# EAGLE board keyboardPCB (EAGLE 9.2.2), part 1 of 2
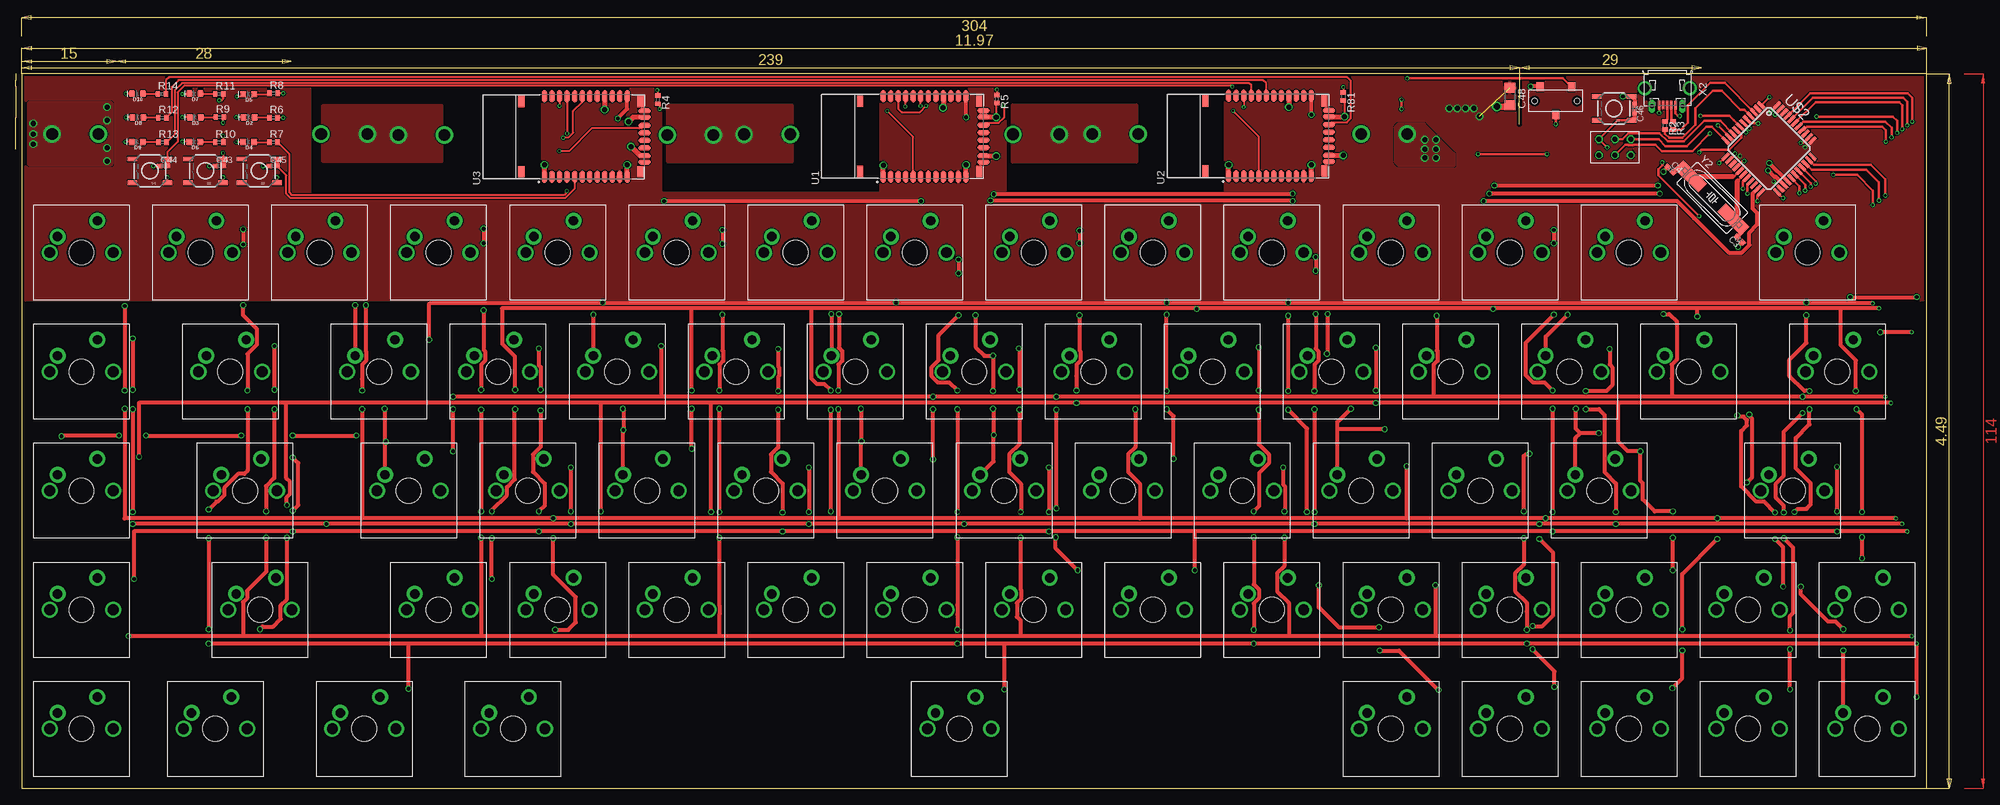
[diagram p0: board, top side]
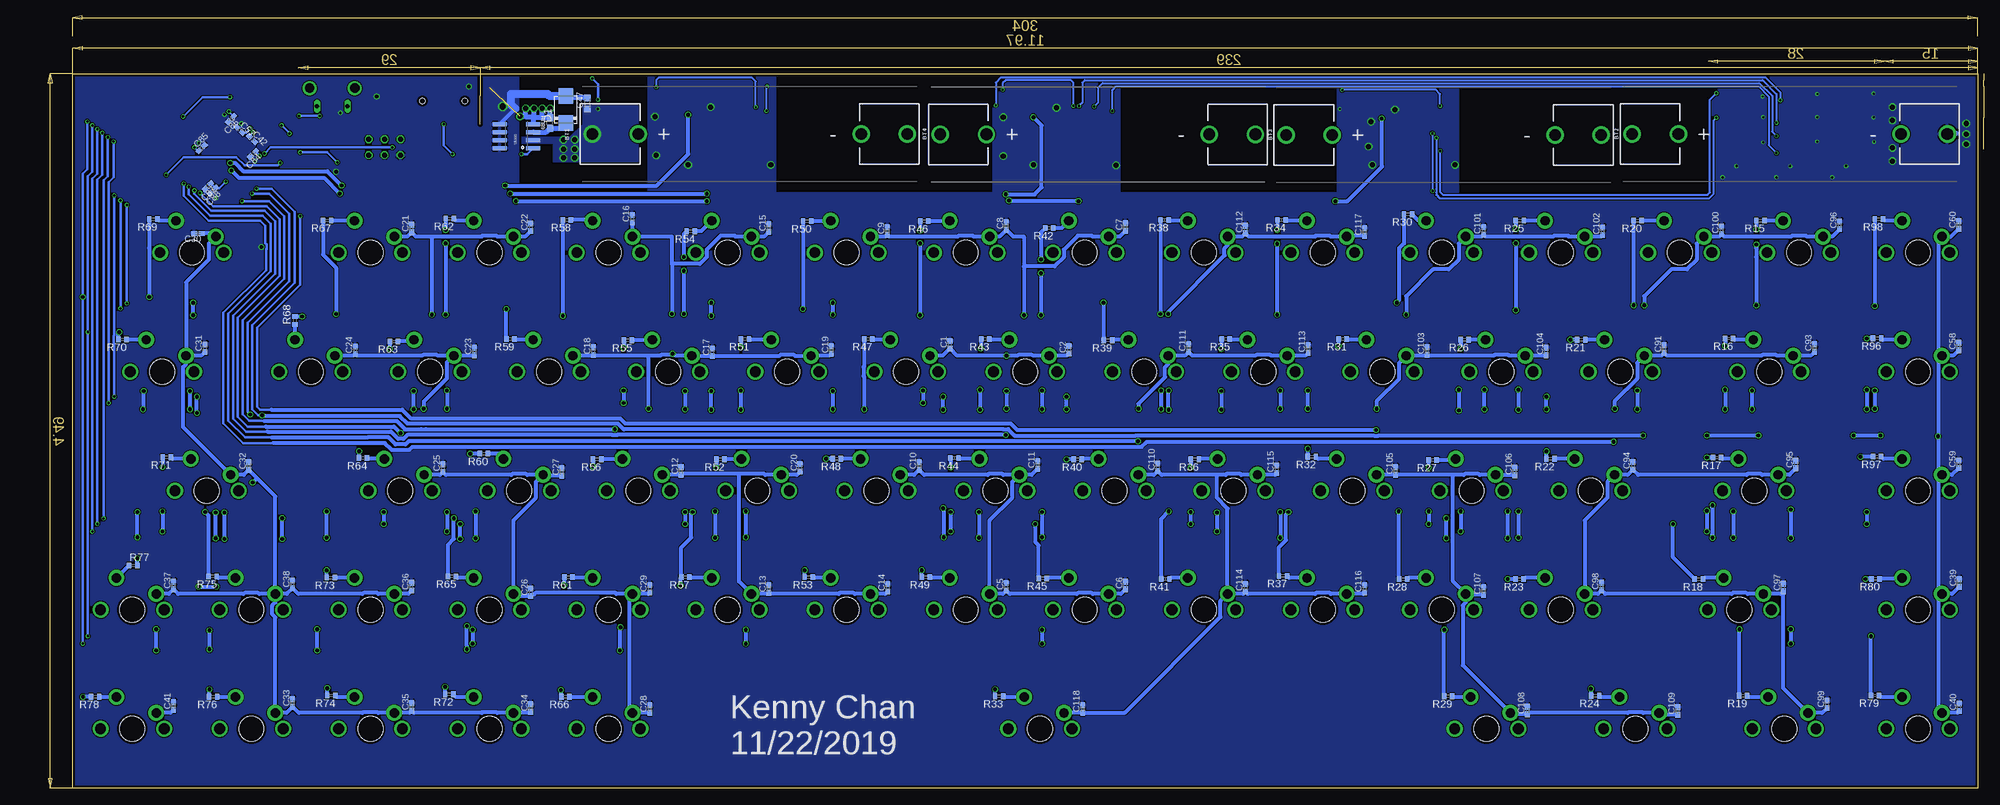
[diagram p1: board, bottom side, seen from below]

Size 304 x 114 mm. Coordinates in mm from the lower left corner, seen from the top.
Outline: 0,0 304,0 304,114 0,114 0,0
Copper layers (1*16): Top 0.035559375mm / dielectric 1.6mm / Bottom 0.035559375mm
Design rules "oshpark-2layer": minimum track width 6mil, minimum drill 10mil, track to track 6mil, track to pad 6mil, pad to pad 6mil, via to via 6mil, smd to smd 6mil, copper to edge 15mil, drill to drill 6mil, minimum pad ring 5mil, minimum via ring 5mil, stop-mask expansion 2.5mil, vias tented up to drill 0mil, thermal gap 10mil

## Footprints (pad centres in the part's own frame; a part is rotated, then mirrored left to right if it is on the bottom)
0603 = smd 1.1 x 1: 1 -0.85,0; 2 0.85,0
BATTERY-AA = drill 1.854: GND@1 25.146,0; GND@2 17.78,0; PWR@1 -25.146,0; PWR@2 -17.78,0
C0402K = smd 0.925 x 0.74: 1 -0.6,0; 2 0.6,0
C0603K = smd 1.05 x 1.08: 1 -0.875,0; 2 0.875,0
C1206 = smd 1.6 x 1.8: 1 -1.4,0; 2 1.4,0
DO214AA = smd 2.5 x 2.3: A 2.15,0; C -2.15,0
LED-0603 = smd 1 x 1: A -0.877,0; C 0.877,0
R0402 = smd 0.7 x 0.9: 1 -0.65,0; 2 0.65,0
TACTILE-SWITCH-SMD = smd 1.524 x 0.762: 1 -2.794,1.905; 2 2.794,1.905; 3 -2.794,-1.905; 4 2.794,-1.905
CL-SB-12B = smd 1.2 x 1.4: 1 -2.5,-2.25; 2 0,2.25; 3 2.5,-2.25 | hole 0.9: 3.4,0; -3.4,0
XCVR_RN42-I/RM = smd 2 x 0.8: 1 -6.4,6.6; 2 -6.4,5.4; 3 -6.4,4.2; 4 -6.4,3; 5 -6.4,1.8; 6 -6.4,0.6; 7 -6.4,-0.6; 8 -6.4,-1.8; 9 -6.4,-3; 10 -6.4,-4.2; 11 -6.4,-5.4; 12 -6.4,-6.6; 13 6.4,-6.6; 14 6.4,-5.4; 15 6.4,-4.2; 16 6.4,-3; 17 6.4,-1.8; 18 6.4,-0.6; 19 6.4,0.6; 20 6.4,1.8; 21 6.4,3; 22 6.4,4.2; 23 6.4,5.4; 24 6.4,6.6 | smd 0.8 x 2: 28 3.1,-9.4; 29 -3.1,-9.4; 30 4.1,-9.4; 31 1.8,-9.4; 32 0.6,-9.4; 33 -0.6,-9.4; 34 -1.8,-9.4; 35 -4.1,-9.4 | smd 1.8 x 1: S1 -5.6,-8.7; S2 5.6,-8.7; S3 5.6,10.3; S4 -5.6,10.3
CHERRY-MX = drill 1.714 pad 1.93: P$3 -5.08,0; P$4 5.08,0 | drill 1.5 pad 2.54: SW1 -3.81,2.54; SW2 2.54,5.08 | hole 4: 0,0
TQFP44 = smd 1.5 x 0.5: 1 -5.8,4; 2 -5.8,3.2; 3 -5.8,2.4; 4 -5.8,1.6; 5 -5.8,0.8; 6 -5.8,0; 7 -5.8,-0.8; 8 -5.8,-1.6; 9 -5.8,-2.4; 10 -5.8,-3.2; 11 -5.8,-4; 23 5.8,-4; 24 5.8,-3.2; 25 5.8,-2.4; 26 5.8,-1.6; 27 5.8,-0.8; 28 5.8,0; 29 5.8,0.8; 30 5.8,1.6; 31 5.8,2.4; 32 5.8,3.2; 33 5.8,4 | smd 0.5 x 1.5: 12 -4,-5.8; 13 -3.2,-5.8; 14 -2.4,-5.8; 15 -1.6,-5.8; 16 -0.8,-5.8; 17 0,-5.8; 18 0.8,-5.8; 19 1.6,-5.8; 20 2.4,-5.8; 21 3.2,-5.8; 22 4,-5.8; 34 4,5.8; 35 3.2,5.8; 36 2.4,5.8; 37 1.6,5.8; 38 0.8,5.8; 39 0,5.8; 40 -0.8,5.8; 41 -1.6,5.8; 42 -2.4,5.8; 43 -3.2,5.8; 44 -4,5.8
AVR-ISP = drill 0.8 octagon: GND 2.54,1.27; MISO -2.54,-1.27; MOSI 0,1.27; RST 2.54,-1.27; SCK 0,-1.27; VCC -2.54,1.27
SOIC-8 = smd 0.61 x 2.21: 1 -1.905,-2.54; 2 -0.635,-2.54; 3 0.635,-2.54; 4 1.905,-2.54; 5 1.905,2.794; 6 0.635,2.794; 7 -0.635,2.794; 8 -1.905,2.794
ZX62D-B-5PA8 = smd 1.35 x 0.4: 1 4.825,1.3; 2 4.825,0.65; 3 4.825,0; 4 4.825,-0.65; 5 4.825,-1.3 | drill 1.5: S1 2.15,-3.6; S2 2.15,3.6 | drill 0.7 long: S3 5.05,2.425; S4 5.05,-2.425
HC49UP = smd 5.334 x 1.93: 1 -4.826,0; 2 4.826,0

## Placement (x,y rotation side)
68UH  33nH/±5%/500mA  [0603]  227.84,106.19 90 bottom
BT1  1.5V  [BATTERY-AA]  195.96,104.41 0 bottom
BT2  1.5V  [BATTERY-AA]  29.97,104.41 0 bottom
BT3  1.5V  [BATTERY-AA]  85.22,104.28 0 bottom
BT4  1.5V  [BATTERY-AA]  140.4,104.37 0 bottom
C1  1uF  [C0402K]  164.01,70.8 90 bottom
C2  1uF  [C0402K]  145.01,69.99 90 bottom
C3  28pF  [C0402K]  274.21,87.57 135 top
C4  28pF  [C0402K]  263.11,98.73 315 top
C5  1uF  [C0402K]  155.01,32.18 90 bottom
C6  1uF  [C0402K]  136.01,32.37 90 bottom
C7  1uF  [C0402K]  136.01,89.56 90 bottom
C8  1uF  [C0402K]  155.01,89.75 90 bottom
C9  1uF  [C0402K]  174.01,88.94 90 bottom
C10  1uF  [C0402K]  168.93,51.44 90 bottom
C11  1uF  [C0402K]  150.01,51.61 90 bottom
C12  1uF  [C0402K]  206.93,50.63 90 bottom
C13  1uF  [C0402K]  192.93,31.82 90 bottom
C14  1uF  [C0402K]  173.93,32.01 90 bottom
C15  1uF  [C0402K]  192.93,89.4 90 bottom
C16  1uF  [C0402K]  214.73,90.89 90 bottom
C17  1uF  [C0402K]  201.93,69.58 90 bottom
C18  1uF  [C0402K]  220.93,69.77 90 bottom
C19  1uF  [C0402K]  182.93,69.96 90 bottom
C20  1uF  [C0402K]  187.93,51.15 90 bottom
C21  1uF  [C0402K]  249.93,89.34 90 bottom
C22  1uF  [C0402K]  230.93,89.53 90 bottom
C23  1uF  [C0402K]  239.93,69.72 90 bottom
C24  1uF  [C0402K]  258.93,69.91 90 bottom
C25  1uF  [C0402K]  244.93,51.1 90 bottom
C26  1uF  [C0402K]  230.93,31.29 90 bottom
C27  1uF  [C0402K]  225.93,50.48 90 bottom
C28  1uF  [C0402K]  211.93,12.67 90 bottom
C29  1uF  [C0402K]  211.93,31.86 90 bottom
C30  1uF  [C0402K]  284.05,88.57 180 bottom
C31  1uF  [C0402K]  282.93,70.24 90 bottom
C32  1uF  [C0402K]  275.93,51.43 90 bottom
C33  1uF  [C0402K]  268.93,13.62 90 bottom
C34  1uF  [C0402K]  230.93,12.81 90 bottom
C35  1uF  [C0402K]  249.93,13 90 bottom
C36  1uF  [C0402K]  249.93,32.19 90 bottom
C37  1uF  [C0402K]  287.93,32.38 90 bottom
C38  1uF  [C0402K]  268.93,32.57 90 bottom
C39  1uF  [C0402K]  2.93,32.76 90 bottom
C40  1uF  [C0402K]  2.93,12.95 90 bottom
C41  1uF  [C0402K]  287.93,13.14 90 bottom
C42  10uF  [C0402K]  275.4,103.6 315 bottom
C43  100nF  [C0402K]  31.5,99.3 0 top
C44  100nF  [C0402K]  22.6,99.3 0 top
C45  100nF  [C0402K]  40.1,99.3 0 top
C46  100nF  [C0402K]  257.4,108.5 270 top
C47  15uF  [C0603K]  221.9,109.3 90 bottom
C48  220uF  [C1206]  237.5,110.4 270 top
C57  1uF  [C0402K]  277.39,105.07 315 bottom
C58  1uF  [C0402K]  3.01,70.52 90 bottom
C59  1uF  [C0402K]  3.01,51.71 90 bottom
C60  1uF  [C0402K]  3.01,89.9 90 bottom
C84  0.1uF  [C0402K]  275.25,101.25 225 bottom
C85  0.1uF  [C0402K]  283.45,102.17 45 bottom
C86  0.1uF  [C0402K]  278.75,106.81 225 bottom
C87  0.1uF  [C0402K]  282.45,96.09 225 bottom
C88  4.7uF  [C0402K]  281.65,95.37 225 bottom
C91  1uF  [C0402K]  50.01,70.09 90 bottom
C93  1uF  [C0402K]  26.01,70.28 90 bottom
C94  1uF  [C0402K]  55.01,51.47 90 bottom
C95  1uF  [C0402K]  29.01,51.66 90 bottom
C96  1uF  [C0402K]  22.01,89.85 90 bottom
C97  1uF  [C0402K]  31.01,32.04 90 bottom
C98  1uF  [C0402K]  60.01,32.23 90 bottom
C99  1uF  [C0402K]  24.01,13.42 90 bottom
C100  1uF  [C0402K]  40.85,89.05 90 bottom
C101  1uF  [C0402K]  78.85,88.97 90 bottom
C102  1uF  [C0402K]  59.85,88.89 90 bottom
C103  1uF  [C0402K]  87.85,69.81 90 bottom
C104  1uF  [C0402K]  68.85,69.73 90 bottom
C105  1uF  [C0402K]  92.85,50.65 90 bottom
C106  1uF  [C0402K]  73.85,50.57 90 bottom
C107  1uF  [C0402K]  78.85,31.49 90 bottom
C108  1uF  [C0402K]  71.85,12.41 90 bottom
C109  1uF  [C0402K]  47.85,12.33 90 bottom
C110  1uF  [C0402K]  130.85,51.25 90 bottom
C111  1uF  [C0402K]  125.93,70.25 90 bottom
C112  1uF  [C0402K]  116.85,89.17 90 bottom
C113  1uF  [C0402K]  106.85,70.09 90 bottom
C114  1uF  [C0402K]  116.85,32.01 90 bottom
C115  1uF  [C0402K]  111.85,50.93 90 bottom
C116  1uF  [C0402K]  97.85,31.85 90 bottom
C117  1uF  [C0402K]  97.85,88.77 90 bottom
C118  1uF  [C0402K]  142.85,12.69 90 bottom
D1  S2A  [DO214AA]  225.34,108.32 90 bottom
D2  GREEN  [LED-0603]  36.26,107.06 180 top
D3  GREEN  [LED-0603]  27.67,107.06 180 top
D4  GREEN  [LED-0603]  36.18,103.16 180 top
D5  RED  [LED-0603]  36.19,110.76 180 top
D6  GREEN  [LED-0603]  27.6,103.16 180 top
D7  RED  [LED-0603]  27.61,110.86 180 top
D8  GREEN  [LED-0603]  18.52,107.06 180 top
D9  GREEN  [LED-0603]  18.43,103.16 180 top
D10  RED  [LED-0603]  18.44,110.86 180 top
R2  22Ohm  [R0402]  262.24,105.79 270 top
R3  22Ohm  [R0402]  263.51,105.79 270 top
R4  10k Ohm  [R0402]  101.5,109.9 270 top
R5  10k Ohm  [R0402]  155.6,110 270 top
R6  55 Ohm  [R0402]  40.15,107.01 0 top
R7  55 Ohm  [R0402]  40.16,103.11 0 top
R8  55 Ohm  [R0402]  40.17,110.91 0 top
R9  55 Ohm  [R0402]  31.58,107.11 0 top
R10  55 Ohm  [R0402]  31.49,103.11 0 top
R11  55 Ohm  [R0402]  31.5,110.81 0 top
R12  55 Ohm  [R0402]  22.41,107.01 0 top
R13  55 Ohm  [R0402]  22.42,103.11 0 top
R14  55 Ohm  [R0402]  22.33,110.81 0 top
R15  1k  [R0402]  34.67,90.59 180 bottom
R16  1k  [R0402]  39.65,71.79 180 bottom
R17  1k  [R0402]  41.57,52.79 180 bottom
R18  1k  [R0402]  44.49,33.39 180 bottom
R19  1k  [R0402]  37.41,14.79 180 bottom
R20  1k  [R0402]  54.27,90.59 180 bottom
R21  1k  [R0402]  63.25,71.59 180 bottom
R22  1k  [R0402]  68.17,52.59 180 bottom
R23  1k  [R0402]  73.09,33.39 180 bottom
R24  1k  [R0402]  61.01,14.79 180 bottom
R25  1k  [R0402]  73.07,90.59 180 bottom
R26  1k  [R0402]  81.85,71.59 180 bottom
R27  1k  [R0402]  86.97,52.39 180 bottom
R28  1k  [R0402]  91.69,33.39 180 bottom
R29  1k  [R0402]  84.49,14.71 180 bottom
R30  1k  [R0402]  90.91,91.61 180 bottom
R31  1k  [R0402]  101.33,71.71 180 bottom
R32  1k  [R0402]  106.25,52.91 180 bottom
R33  1k  [R0402]  156.17,14.71 180 bottom
R34  1k  [R0402]  111.09,90.71 180 bottom
R35  1k  [R0402]  120.01,71.71 180 bottom
R36  1k  [R0402]  124.93,52.51 180 bottom
R37  1k  [R0402]  110.85,33.91 180 bottom
R38  1k  [R0402]  129.77,90.71 180 bottom
R39  1k  [R0402]  138.79,71.51 180 bottom
R40  1k  [R0402]  143.61,52.51 180 bottom
R41  1k  [R0402]  129.63,33.41 180 bottom
R42  1k  [R0402]  148.15,89.41 180 bottom
R43  1k  [R0402]  158.37,71.71 180 bottom
R44  1k  [R0402]  163.29,52.71 180 bottom
R45  1k  [R0402]  149.21,33.51 180 bottom
R46  1k  [R0402]  168.13,90.51 180 bottom
R47  1k  [R0402]  177.05,71.71 180 bottom
R48  1k  [R0402]  182.07,52.61 180 bottom
R49  1k  [R0402]  167.89,33.71 180 bottom
R50  1k  [R0402]  186.81,90.51 180 bottom
R51  1k  [R0402]  196.73,71.71 180 bottom
R52  1k  [R0402]  200.65,52.51 180 bottom
R53  1k  [R0402]  186.57,33.71 180 bottom
R54  1k  [R0402]  205.39,88.91 180 bottom
R55  1k  [R0402]  215.41,71.51 180 bottom
R56  1k  [R0402]  220.33,52.51 180 bottom
R57  1k  [R0402]  206.25,33.71 180 bottom
R58  1k  [R0402]  225.17,90.71 180 bottom
R59  1k  [R0402]  234.19,71.71 180 bottom
R60  1k  [R0402]  238.41,53.41 180 bottom
R61  1k  [R0402]  224.93,33.71 180 bottom
R62  1k  [R0402]  243.85,90.91 180 bottom
R63  1k  [R0402]  252.77,71.31 180 bottom
R64  1k  [R0402]  257.69,52.71 180 bottom
R65  1k  [R0402]  243.49,33.83 180 bottom
R66  1k  [R0402]  225.41,14.63 180 bottom
R67  1k  [R0402]  263.43,90.63 180 bottom
R68  1k  [R0402]  268.57,74.65 90 bottom
R69  1k  [R0402]  291.17,90.83 180 bottom
R70  1k  [R0402]  296.09,71.63 180 bottom
R71  1k  [R0402]  289.01,52.83 180 bottom
R72  1k  [R0402]  243.93,15.03 180 bottom
R73  1k  [R0402]  262.85,33.63 180 bottom
R74  1k  [R0402]  262.77,14.83 180 bottom
R75  1k  [R0402]  281.69,33.83 180 bottom
R76  1k  [R0402]  281.61,14.63 180 bottom
R77  1k  [R0402]  294.37,35.57 0 bottom
R78  1k  [R0402]  300.45,14.63 180 bottom
R79  1k  [R0402]  16.37,14.83 180 bottom
R80  1k  [R0402]  16.29,33.43 180 bottom
R81  10k Ohm  [R0402]  210.9,110.4 270 top
R96  1k  [R0402]  16.01,71.83 180 bottom
R97  1k  [R0402]  16.03,52.93 180 bottom
R98  1k  [R0402]  15.75,90.83 180 bottom
S1  SWITCH-MOMENTARY-2SMD  [TACTILE-SWITCH-SMD]  254.1,108.5 180 top
S2  SWITCH-MOMENTARY-2SMD  [TACTILE-SWITCH-SMD]  37.87,98.53 180 top
S3  SWITCH-MOMENTARY-2SMD  [TACTILE-SWITCH-SMD]  29.3,98.53 180 top
S4  SWITCH-MOMENTARY-2SMD  [TACTILE-SWITCH-SMD]  20.43,98.53 180 top
S5  CL-SB-12B-01T  [CL-SB-12B]  244.8,109.7 180 top
U1  RN42-I/RM  [XCVR_RN42-I/RM]  144.06,104.03 90 top
U2  RN42-I/RM  [XCVR_RN42-I/RM]  199.2,104.1 90 top
U3  RN42-I/RM  [XCVR_RN42-I/RM]  90.01,104.01 90 top
U$1  CHERRY-MX  [CHERRY-MX]  142.5,85.5 0 top
U$2  ATMEGA32U4-AU  [TQFP44]  278.86,102.08 315 top
U$3  CHERRY-MX  [CHERRY-MX]  152,66.5 0 top
U$4  CHERRY-MX  [CHERRY-MX]  156.75,47.5 0 top
U$5  CHERRY-MX  [CHERRY-MX]  142.5,28.5 0 top
U$6  CHERRY-MX  [CHERRY-MX]  161.5,85.5 0 top
U$7  CHERRY-MX  [CHERRY-MX]  171,66.5 0 top
U$8  CHERRY-MX  [CHERRY-MX]  175.75,47.5 0 top
U$9  CHERRY-MX  [CHERRY-MX]  161.5,28.5 0 top
U$10  CHERRY-MX  [CHERRY-MX]  180.5,85.5 0 top
U$11  CHERRY-MX  [CHERRY-MX]  190,66.5 0 top
U$12  CHERRY-MX  [CHERRY-MX]  194.75,47.5 0 top
U$13  CHERRY-MX  [CHERRY-MX]  180.5,28.5 0 top
U$14  CHERRY-MX  [CHERRY-MX]  199.5,85.5 0 top
U$15  CHERRY-MX  [CHERRY-MX]  209,66.5 0 top
U$16  CHERRY-MX  [CHERRY-MX]  213.75,47.5 0 top
U$17  CHERRY-MX  [CHERRY-MX]  199.5,28.5 0 top
U$18  CHERRY-MX  [CHERRY-MX]  218.5,85.5 0 top
U$19  CHERRY-MX  [CHERRY-MX]  228,66.5 0 top
U$20  CHERRY-MX  [CHERRY-MX]  232.75,47.5 0 top
U$21  CHERRY-MX  [CHERRY-MX]  218.5,28.5 0 top
U$22  CHERRY-MX  [CHERRY-MX]  237.5,85.5 0 top
U$23  CHERRY-MX  [CHERRY-MX]  247,66.5 0 top
U$24  CHERRY-MX  [CHERRY-MX]  251.75,47.5 0 top
U$25  CHERRY-MX  [CHERRY-MX]  237.5,28.5 0 top
U$26  CHERRY-MX  [CHERRY-MX]  218.5,9.5 0 top
U$27  CHERRY-MX  [CHERRY-MX]  256.5,85.5 0 top
U$28  CHERRY-MX  [CHERRY-MX]  266,66.5 0 top
U$29  CHERRY-MX  [CHERRY-MX]  285,85.5 0 top
U$30  CHERRY-MX  [CHERRY-MX]  289.75,66.5 0 top
U$31  CHERRY-MX  [CHERRY-MX]  282.62,47.5 0 top
U$32  CHERRY-MX  [CHERRY-MX]  237.5,9.5 0 top
U$33  CHERRY-MX  [CHERRY-MX]  256.5,28.5 0 top
U$34  CHERRY-MX  [CHERRY-MX]  256.5,9.5 0 top
U$35  CHERRY-MX  [CHERRY-MX]  275.5,28.5 0 top
U$36  CHERRY-MX  [CHERRY-MX]  275.5,9.5 0 top
U$37  CHERRY-MX  [CHERRY-MX]  294.5,28.5 0 top
U$38  CHERRY-MX  [CHERRY-MX]  294.5,9.5 0 top
U$39  CHERRY-MX  [CHERRY-MX]  9.5,9.5 0 top
U$40  CHERRY-MX  [CHERRY-MX]  9.5,28.5 0 top
U$56  CHERRY-MX  [CHERRY-MX]  9.5,66.5 0 top
U$57  CHERRY-MX  [CHERRY-MX]  9.5,47.5 0 top
U$58  CHERRY-MX  [CHERRY-MX]  9.5,85.5 0 top
U$59  AVR-ISP  [AVR-ISP]  254.24,102.31 180 top
U$166  MIC4680  [SOIC-8]  233.07,104.07 90 bottom
U$167  CHERRY-MX  [CHERRY-MX]  28.5,85.5 0 top
U$168  CHERRY-MX  [CHERRY-MX]  33.25,66.5 0 top
U$169  CHERRY-MX  [CHERRY-MX]  35.62,47.5 0 top
U$170  CHERRY-MX  [CHERRY-MX]  38,28.5 0 top
U$171  CHERRY-MX  [CHERRY-MX]  30.88,9.5 0 top
U$172  CHERRY-MX  [CHERRY-MX]  47.5,85.5 0 top
U$173  CHERRY-MX  [CHERRY-MX]  57,66.5 0 top
U$174  CHERRY-MX  [CHERRY-MX]  61.75,47.5 0 top
U$175  CHERRY-MX  [CHERRY-MX]  66.5,28.5 0 top
U$176  CHERRY-MX  [CHERRY-MX]  54.62,9.5 0 top
U$177  CHERRY-MX  [CHERRY-MX]  66.5,85.5 0 top
U$178  CHERRY-MX  [CHERRY-MX]  76,66.5 0 top
U$179  CHERRY-MX  [CHERRY-MX]  80.75,47.5 0 top
U$180  CHERRY-MX  [CHERRY-MX]  85.5,28.5 0 top
U$181  CHERRY-MX  [CHERRY-MX]  78.38,9.5 0 top
U$182  CHERRY-MX  [CHERRY-MX]  85.5,85.5 0 top
U$183  CHERRY-MX  [CHERRY-MX]  95,66.5 0 top
U$184  CHERRY-MX  [CHERRY-MX]  99.75,47.5 0 top
U$185  CHERRY-MX  [CHERRY-MX]  149.62,9.5 0 top
U$186  CHERRY-MX  [CHERRY-MX]  104.5,85.5 0 top
U$187  CHERRY-MX  [CHERRY-MX]  114,66.5 0 top
U$188  CHERRY-MX  [CHERRY-MX]  118.75,47.5 0 top
U$189  CHERRY-MX  [CHERRY-MX]  104.5,28.5 0 top
U$190  CHERRY-MX  [CHERRY-MX]  123.5,85.5 0 top
U$191  CHERRY-MX  [CHERRY-MX]  133,66.5 0 top
U$192  CHERRY-MX  [CHERRY-MX]  137.75,47.5 0 top
U$193  CHERRY-MX  [CHERRY-MX]  123.5,28.5 0 top
X2  ZX62D-B-5PA8  [ZX62D-B-5PA8]  262.6,113.9 270 top
Y2  16MHz  [HC49UP]  269.75,94.24 315 top

## Library data of the parts
68UH = SparkFun-Coils; PROD_ID: NDUC-07874
BT1-BT4 = SparkFun-Batteries; PROD_ID: BATT-08316; SF_SKU: PRT-07949
C1-C46 C57-C60 C84-C88 C91 C93-C118 R2-R81 R96-R98 = resistor
C47 C48 = rcl; SPICEPREFIX: C
D1 = s2x_10; MF: Fairchild; MPN: S2A; OC_FARNELL: 1467485; OC_NEWARK: 58K2391
D2-D4 D6 D8 D9 = SparkFun-LED; PROD_ID: DIO-00821
D5 D7 D10 = SparkFun-LED; PROD_ID: DIO-00819
S1-S4 = quad; PROD_ID: SWCH-08247
S5 = CL-SB-12B-01T; AVAILABILITY: Unavailable; DESCRIPTION: Switch Slide N.O./N.C. SPDT Top Slide 0.2A 12VDC Gull Wing SMD T/R; MF: Nidec Copal; MP: CL-SB-12B-01T; PACKAGE: None; PRICE: None
U1-U3 = RN42-I_RM; AVAILABILITY: Unavailable; DESCRIPTION: Bluetooth Module; MF: Microchip; MP: RN42-I/RM; PACKAGE: SMD-35 Roving Networks; PRICE: None
U$1 U$3-U$40 U$56-U$58 U$167-U$193 = cherrymx
U$2 = adafruit
U$59 = AVR-ISP; AVAILABILITY: Unavailable; DESCRIPTION: Emulators / Simulators AVR USB IN CIRCUIT EMUL/PRGMR ISP; MF: Gravitech; MP: AVR-ISP; PACKAGE: None; PRICE: None
U$166 = MIC4680; AVAILABILITY: Unavailable; MF: Micrel; MP: MIC4680; PACKAGE: None; PRICE: None
X2 = MicroUSB; MF: Hirose; MPN: ZX62D-B-5PA8; OC_FARNELL: 2300438; OC_NEWARK: 69W0712
Y2 = quad

## Nets
3.3V: 68UH.2 C48.1 C84.1 C85.1 C86.1 C87.1 C88.1 U1.11 U2.11 U3.11 U$2.2 U$2.14 U$2.24 U$2.34 U$2.42 U$2.44 U$59.VCC U$166.4
CONNECTLED1: R6.2 U3.19
CONNECTLED2: R9.2 U1.19
CONNECTLED3: R12.2 U2.19
D+: R2.2 U$2.4
D-: R3.2 U$2.3
GND: BT2.GND@1 C1.2 C2.2 C3.1 C4.1 C5.2 C6.2 C7.2 C8.2 C9.2 C10.2 C11.2 C12.2 C13.2 C14.2 C15.2 C16.2 C17.2 C18.2 C19.2 C20.2 C21.2 C22.2 C23.2 C24.2 C25.2 C26.2 C27.2 C28.2 C29.2 C30.2 C31.2 C32.2 C33.2 C34.2 C35.2 C36.2 C37.2 C38.2 C39.2 C40.2 C41.2 C42.2 C43.1 C44.1 C45.1 C46.1 C47.2 C48.2 C57.1 C58.2 C59.2 C60.2 C84.2 C85.2 C86.2 C87.2 C88.2 C91.2 C93.2 C94.2 C95.2 C96.2 C97.2 C98.2 C99.2 C100.2 C101.2 C102.2 C103.2 C104.2 C105.2 C106.2 C107.2 C108.2 C109.2 C110.2 C111.2 C112.2 C113.2 C114.2 C115.2 C116.2 C117.2 C118.2 D1.A D2.C D3.C D4.C D5.C D6.C D7.C D8.C D9.C D10.C R4.2 R5.2 R81.2 S1.3 S2.1 S3.1 S4.1 S5.3 U1.1 U1.12 U1.16 U1.28 U1.29 U2.1 U2.12 U2.16 U2.28 U2.29 U3.1 U3.12 U3.16 U3.28 U3.29 U$2.5 U$2.15 U$2.23 U$2.35 U$2.43 U$59.GND U$166.5 U$166.6 U$166.7 U$166.8 X2.5
IN1: C91.1 C93.1 C94.1 C95.1 C96.1 C97.1 C98.1 C99.1 C100.1 U$2.30 U$167.SW1 U$168.SW1 U$169.SW1 U$170.SW1 U$171.SW1 U$172.SW1 U$173.SW1 U$174.SW1 U$175.SW1
IN2: C101.1 C102.1 C103.1 C104.1 C105.1 C106.1 C107.1 C108.1 C109.1 U$2.8 U$176.SW1 U$177.SW1 U$178.SW1 U$179.SW1 U$180.SW1 U$181.SW1 U$182.SW1 U$183.SW1 U$184.SW1
IN3: C110.1 C111.1 C112.1 C113.1 C114.1 C115.1 C116.1 C117.1 C118.1 U$2.29 U$185.SW1 U$186.SW1 U$187.SW1 U$188.SW1 U$189.SW1 U$190.SW1 U$191.SW1 U$192.SW1 U$193.SW1
IN4: C1.1 C2.1 C5.1 C6.1 C7.1 C8.1 C9.1 C10.1 C11.1 U$1.SW1 U$2.28 U$3.SW1 U$4.SW1 U$5.SW1 U$6.SW1 U$7.SW1 U$8.SW1 U$9.SW1 U$10.SW1
IN5: C12.1 C13.1 C14.1 C15.1 C16.1 C17.1 C18.1 C19.1 C20.1 U$2.22 U$11.SW1 U$12.SW1 U$13.SW1 U$14.SW1 U$15.SW1 U$16.SW1 U$17.SW1 U$18.SW1 U$19.SW1
IN6: C21.1 C22.1 C23.1 C24.1 C25.1 C26.1 C27.1 C28.1 C29.1 U$2.27 U$20.SW1 U$21.SW1 U$22.SW1 U$23.SW1 U$24.SW1 U$25.SW1 U$26.SW1 U$27.SW1 U$28.SW1
IN7: C30.1 C31.1 C32.1 C33.1 C34.1 C35.1 C36.1 C37.1 C38.1 U$2.19 U$29.SW1 U$30.SW1 U$31.SW1 U$32.SW1 U$33.SW1 U$34.SW1 U$35.SW1 U$36.SW1 U$37.SW1
IN8: C39.1 C40.1 C41.1 C58.1 C59.1 C60.1 U$2.18 U$38.SW1 U$39.SW1 U$40.SW1 U$56.SW1 U$57.SW1 U$58.SW1
MISO: U$2.11 U$59.MISO
MOSI: U$2.10 U$59.MOSI
N$2: R42.1 U$1.SW2
N$3: BT2.PWR@1 BT3.GND@1
N$4: C57.2 U$2.6
N$5: BT3.PWR@1 BT4.GND@1
N$6: R96.1 U$56.SW2
N$7: R43.1 U$3.SW2
N$8: R4.1 U3.22
N$9: R97.1 U$57.SW2
N$10: D2.A R6.1
N$11: D4.A R7.1
N$12: R44.1 U$4.SW2
N$13: R98.1 U$58.SW2
N$14: BT1.GND@1 BT4.PWR@1
N$15: R45.1 U$5.SW2
N$16: D5.A R8.1
N$17: 68UH.1 D1.C U$166.3
N$18: R46.1 U$6.SW2
N$20: R47.1 U$7.SW2
N$21: D3.A R9.1
N$22: D6.A R10.1
N$24: D7.A R11.1
N$25: D8.A R12.1
N$26: R48.1 U$8.SW2
N$27: D9.A R13.1
N$28: R5.1 U1.22
N$29: R49.1 U$9.SW2
N$30: D10.A R14.1
N$31: R50.1 U$10.SW2
N$32: R2.1 X2.3
N$33: R51.1 U$11.SW2
N$35: R52.1 U$12.SW2
N$37: R53.1 U$13.SW2
N$38: R54.1 U$14.SW2
N$39: R24.1 U$176.SW2
N$40: R55.1 U$15.SW2
N$41: R15.1 U$167.SW2
N$42: R56.1 U$16.SW2
N$43: R57.1 U$17.SW2
N$44: R58.1 U$18.SW2
N$45: R3.1 X2.2
N$46: R59.1 U$19.SW2
N$47: R60.1 U$20.SW2
N$48: R61.1 U$21.SW2
N$49: R62.1 U$22.SW2
N$50: R63.1 U$23.SW2
N$51: R64.1 U$24.SW2
N$52: R65.1 U$25.SW2
N$53: R66.1 U$26.SW2
N$54: R67.1 U$27.SW2
N$55: R16.1 U$168.SW2
N$56: R68.1 U$28.SW2
N$57: R69.1 U$29.SW2
N$58: R81.1 U2.22
N$59: R25.1 U$177.SW2
N$61: R70.1 U$30.SW2
N$63: R71.1 U$31.SW2
N$65: R72.1 U$32.SW2
N$67: R73.1 U$33.SW2
N$69: R17.1 U$169.SW2
N$70: R74.1 U$34.SW2
N$72: R75.1 U$35.SW2
N$74: R76.1 U$36.SW2
N$76: R77.1 U$37.SW2
N$78: R78.1 U$38.SW2
N$80: R79.1 U$39.SW2
N$81: R80.1 U$40.SW2
N$82: R18.1 U$170.SW2
N$86: R26.1 U$178.SW2
N$88: R19.1 U$171.SW2
N$95: R20.1 U$172.SW2
N$98: R27.1 U$179.SW2
N$108: R21.1 U$173.SW2
N$120: R22.1 U$174.SW2
N$122: R28.1 U$180.SW2
N$123: R23.1 U$175.SW2
N$126: R29.1 U$181.SW2
N$128: R30.1 U$182.SW2
N$130: R31.1 U$183.SW2
N$132: R32.1 U$184.SW2
N$134: R33.1 U$185.SW2
N$136: R34.1 U$186.SW2
N$138: R35.1 U$187.SW2
N$140: R36.1 U$188.SW2
N$142: R37.1 U$189.SW2
N$144: R38.1 U$190.SW2
N$146: R39.1 U$191.SW2
N$148: R40.1 U$192.SW2
N$150: R41.1 U$193.SW2
OUT1: R15.2 R24.2 R33.2 R42.2 R51.2 R60.2 R69.2 R78.2 U$2.41
OUT2: R16.2 R25.2 R34.2 R43.2 R52.2 R61.2 R70.2 R79.2 U$2.40
OUT3: R17.2 R26.2 R35.2 R44.2 R53.2 R62.2 R71.2 R80.2 U$2.39
OUT4: R18.2 R27.2 R36.2 R45.2 R54.2 R63.2 R72.2 R96.2 U$2.1
OUT5: R19.2 R28.2 R37.2 R46.2 R55.2 R64.2 R73.2 R97.2 U$2.37
OUT6: R20.2 R29.2 R38.2 R47.2 R56.2 R65.2 R74.2 R98.2 U$2.38
OUT7: R21.2 R30.2 R39.2 R48.2 R57.2 R66.2 R75.2 U$2.12
OUT8: R22.2 R31.2 R40.2 R49.2 R58.2 R67.2 R76.2 U$2.32
OUT9: R23.2 R32.2 R41.2 R50.2 R59.2 R68.2 R77.2 U$2.31
PWRSWITCH: S5.2 U$166.1
RESET1: C45.2 S2.3 U3.5
RESET2: C43.2 S3.3 U1.5
RESET3: C44.2 S4.3 U2.5
RST: C46.2 S1.1 U$2.13 U$59.RST
SCK: U$2.9 U$59.SCK
STATUSLED1: R7.2 U3.21
STATUSLED2: R10.2 U1.21
STATUSLED3: R13.2 U2.21
TX1: U3.13 U$2.21
TX2: U1.13 U$2.25
TX3: U2.13 U$2.26
TXRXLED1: R8.2 U3.31
TXRXLED2: R11.2 U1.31
TXRXLED3: R14.2 U2.31
VBUS: C42.1 U$2.7 X2.1
VIN: BT1.PWR@1 C47.1 S5.1 U$166.2
XTAL1: C3.2 U$2.17 Y2.2
XTAL2: C4.2 U$2.16 Y2.1